# Altium PCB FT232RL.PCBDOC
Units mm, origin at the board's own origin, x right, y up, seen from the top; angles counter-clockwise.
Board outline 152.4 x 101.6 mm, 2 copper layers (Top Layer, Bottom Layer); 6 components, 7 nets, 52 pads, 5 vias.
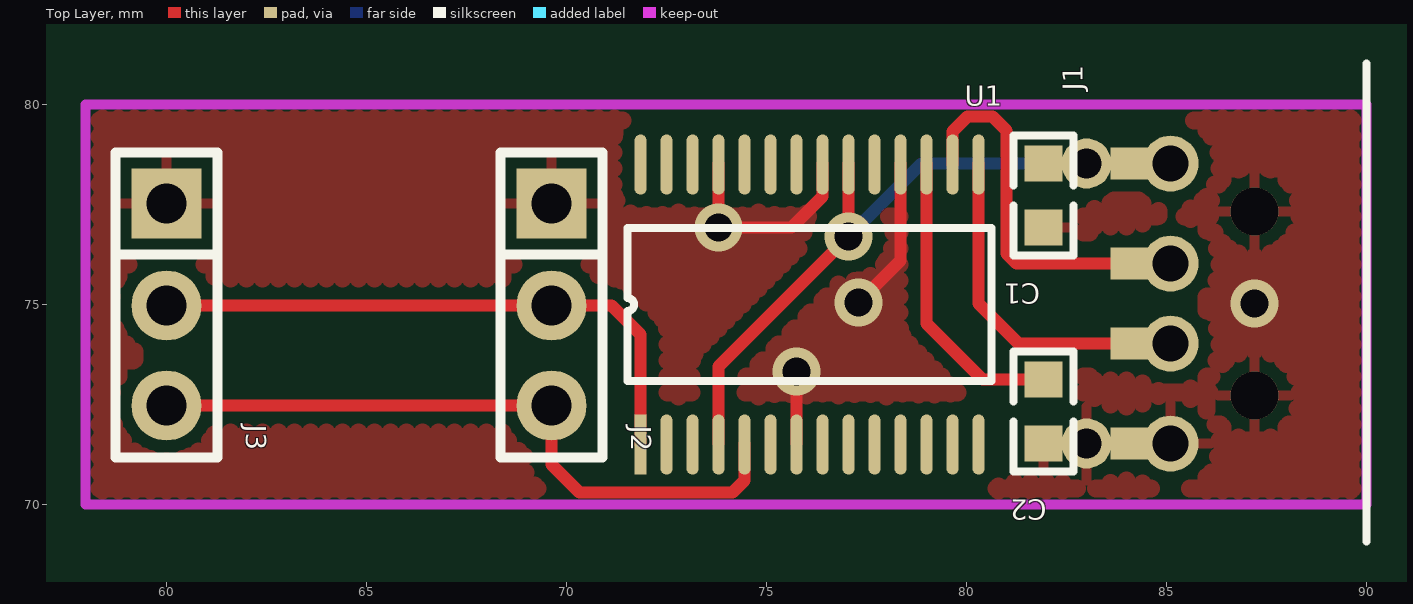
[diagram p0: Top Layer view]
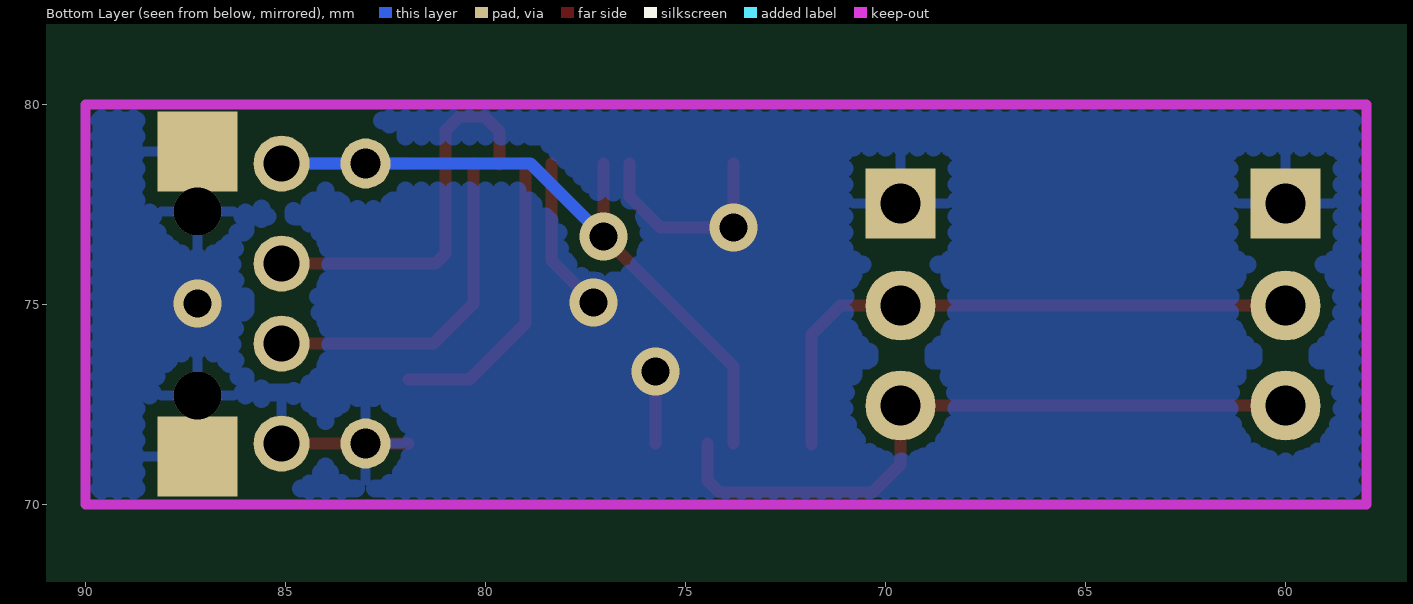
[diagram p1: Bottom Layer view, seen from below]

## Layer stack, top to bottom
Top Layer: signal copper 0.0356
Dielectric: dielectric 0.32, FR-4, Dk 4.8
Bottom Layer: signal copper 0.0356

## Board outline
25.4,25.4 177.8,25.4 177.8,127 25.4,127

## Design rules (kind name [scope] priority, off if disabled: settings)
Clearance Clearance_KeepOut [OnLayer('Keep-Out Layer')] p1: gap=0
Clearance [All] p2: gap=0.3
ComponentClearance [All] p1: gap=0.254 collisioncheckmode=0
PolygonConnect [All] p1: connectstyle=Relief reliefconductorwidth=0.254 reliefentries=4 polygonreliefangle="90 Angle"
RoutingLayers [All] p1: top layer=Horizontal bottom layer=Vertical
RoutingVias [All] p1: holewidth=0.711 width=1.27 viastyle="Through Hole" minholewidth=0.711 minwidth=1.27 maxholewidth=0.711 maxwidth=1.27
SolderMaskExpansion [All] p1: expansion=0.102
TestPointUsage [All] p1: valid=0 allowmultiple=FALSE
Testpoint [All] p1: side=15 testpointundercomponent=TRUE minsize=1.016 maxsize=2.54 preferedsize=1.524 minholesize=0 maxholesize=1.016 preferedholesize=0.813 testpointgrid=0.025 style=1023 order=1234567890
Width [All] p1: maxlimit=3 minlimit=0.25 preferedwidth=0.254 toplayer_prefwidth=0.3 bottomlayer_prefwidth=0.3 minimp=50.000000 maximp=50.000000 favimp=50.000000
16 further rules are at their usual default settings.

## Components (designator, comment, footprint, x,y, rotation, side; value= is the part's Value field where it differs from the comment)
C1 "100nF" 0603 81.925,77.725 r270 top
C2 "100nF" 0603 81.925,72.325 r270 top
J1 "CON4" "USB A MALE 2" 90,75.025 r90 top
J2 "CON3" SIP3 69.625,77.525 r270 top
J3 "CON3" SIP3 60,77.525 r270 top
U1 "FT232RL" SSOP-28 71.85,71.5 r90 top

## Footprints (in the part's own frame and the unit in brackets; to place one, negate y for a bottom-side part, rotate by r counter-clockwise, add the part's x,y. Pads: shape width x height; smd on the part's side, far side on the other; paste and mask are expansions set on the pad)
0603 [mm]
  rect 0.9x0.95 smd: 1(-0.8,0) 2(0.8,0)
  silkscreen extent -1.5,-0.75 1.5,0.75
SIP3 [mm]
  rect 1.75x1.75 hole 1: 1(0,0)
  round 1.75 hole 1: 2(2.55,0) 3(5.05,0)
  silkscreen extent -1.27,-1.27 6.35,1.27
SSOP-28 [mm]
  rect 1.5x0.3 smd: 1(0,0)
  oval 1.5x0.3 smd: 2(0,-0.65) 3(0,-1.3) 4(0,-1.95) 5(0,-2.6) 6(0,-3.25) 7(0,-3.9) 8(0,-4.55) 9(0,-5.2) 10(0,-5.85) 11(0,-6.5) 12(0,-7.15) 13(0,-7.8) 14(0,-8.45) 15(7,-8.45) 16(7,-7.8) 17(7,-7.15) 18(7,-6.5) 19(7,-5.85) 20(7,-5.2) 21(7,-4.55) 22(7,-3.9) 23(7,-3.25) 24(7,-2.6) 25(7,-1.95) 26(7,-1.3) 27(7,-0.65) 28(7,0)
  silkscreen extent 1.58,-8.78 5.42,0.33
"USB A MALE 2" [mm]
  round 1.4 hole 0.9: 1(3.5,4.9) 2(1,4.9) 3(-1,4.9) 4(-3.5,4.9)
  rect 0.8x2 smd: 1(3.5,5.4) 2(1,5.4) 3(-1,5.4) 4(-3.5,5.4)
  rect 2x2 smd far side: 4(-3.825,2.8) 4(3.8,2.8)
  round 1.2 hole 1.2: 4(-2.3,2.8) 4(2.3,2.8)
  silkscreen extent -5.95,0 6,0

## Part data
C1 C2: library part CAP, "Capacitor"
J1 J2 J3: "Connector"

## Free pads (board coordinates)
  round 1.25 hole 0.75: 0(83,71.525) 0(83,78.525)

## Via types
v1: diameter 1.2, hole 0.7, Top Layer to Bottom Layer, 5 vias

## Nets (pads, with @x,y where several pads share a name; then routed paths per layer and width w, separated by ;. In a path a pad name is that pad's centre, name@x,y a point inside that pad or via, vN(x,y) a via of type N, cw(c..) or ccw(c..) an arc to the next point about the centre after c; other vN are vias at no path point)
3.3V: C2.1 U1.17 | length 7.5
  Top Layer w0.3: U1.17@79,78.525 79,74.525 80.4,73.125 C2.1
GND: C1.2 C2.2 J1.4 J2.1 J3.1 pad.0@83,71.525 U1.7 U1.18 U1.21 U1.25 | length 14.2
  Top Layer w0.3: U1.25@73.8,78.525 v1(73.8,76.925) 75.625,76.925 76.4,77.7 U1.21 U1.21@76.4,78.525 ; U1.7@75.75,71.525 v1(75.75,73.325) ; v1(77.3,75.05) 78.35,76.1 U1.18@78.35,78.525 ; C2.2 J1.4@85.1,71.525
  other v1: 87.2,75.025
RX: J2.2 J3.2 U1.1 | length 14.9
  Top Layer w0.3: J3.2 71.125,74.975 71.85,74.25 U1.1
TX: J2.3 J3.3 U1.5 | length 17.3
  Top Layer w0.3: J3.3 J2.3 69.625,71 70.325,70.3 74.15,70.3 74.45,70.6 U1.5@74.45,71.525
USBDM: J1.2 U1.16 | length 9.8
  Top Layer w0.3: U1.16 79.65,79.325 80.025,79.7 80.65,79.7 81,79.35 81,76.275 81.25,76.025 J1.2@85.1,76.025
USBDP: J1.3 U1.15 | length 8.7
  Top Layer w0.3: U1.15@80.3,78.525 80.3,75.025 81.3,74.025 J1.3@85.1,74.025
VCC: C1.1 J1.1 pad.0@83,78.525 U1.4 U1.20 | length 20.5
  Top Layer w0.3: U1.4@73.8,71.525 73.8,73.45 v1(77.05,76.7) U1.20@77.05,78.525 ; C1.1 J1.1@85.1,78.525
  Bottom Layer w0.3: v1@77.05,76.875 v1(77.05,76.7) 78.875,78.525 J1.1@85.1,78.525
pads on no net: U1.2 U1.3 U1.6 U1.8 U1.9 U1.10 U1.11 U1.12 U1.13 U1.14 U1.19 U1.22 U1.23 U1.24 U1.26 U1.27 U1.28

## Polygon pours and split planes (outlines as drawn)
GND on Top Layer (hatched 90Degree grid 0.4 track 0.45, remove dead copper): 57.975,70 90,70 90,80 57.975,80
GND on Bottom Layer (hatched 90Degree grid 0.4 track 0.45, remove dead copper): 57.975,70 90,70 90,80 57.975,80

## Keep-outs
Keep-Out Layer:
  lines w0.254: 57.975,70 57.975,80 90,80 90,70 57.975,70